# Altium PCB PowerReceiver.PcbDoc
Units mil, origin at the board's own origin, x right, y up, seen from the top; angles counter-clockwise.
Board outline 1181.1 x 1181.1 mil, 2 copper layers (Top Layer, Bottom Layer); 11 components, 6 nets, 26 pads, 0 vias.
Unrouted connection lines stored in the file: 17.
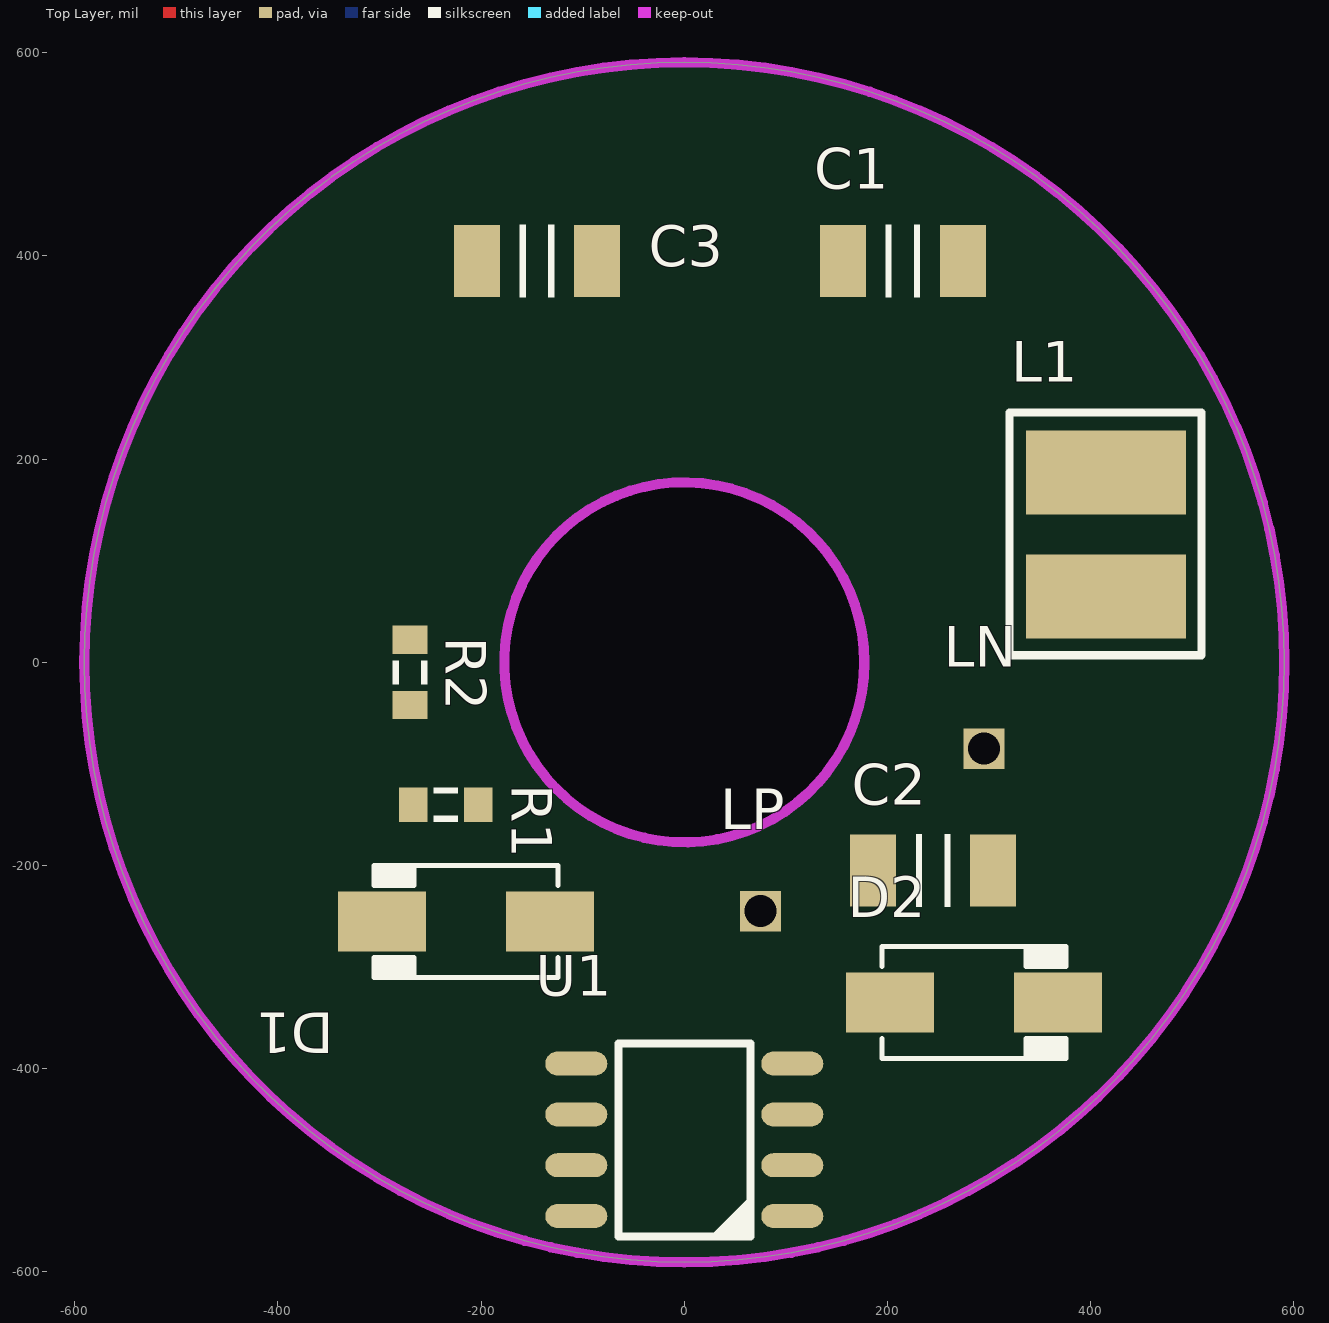
[diagram p0: Top Layer view]
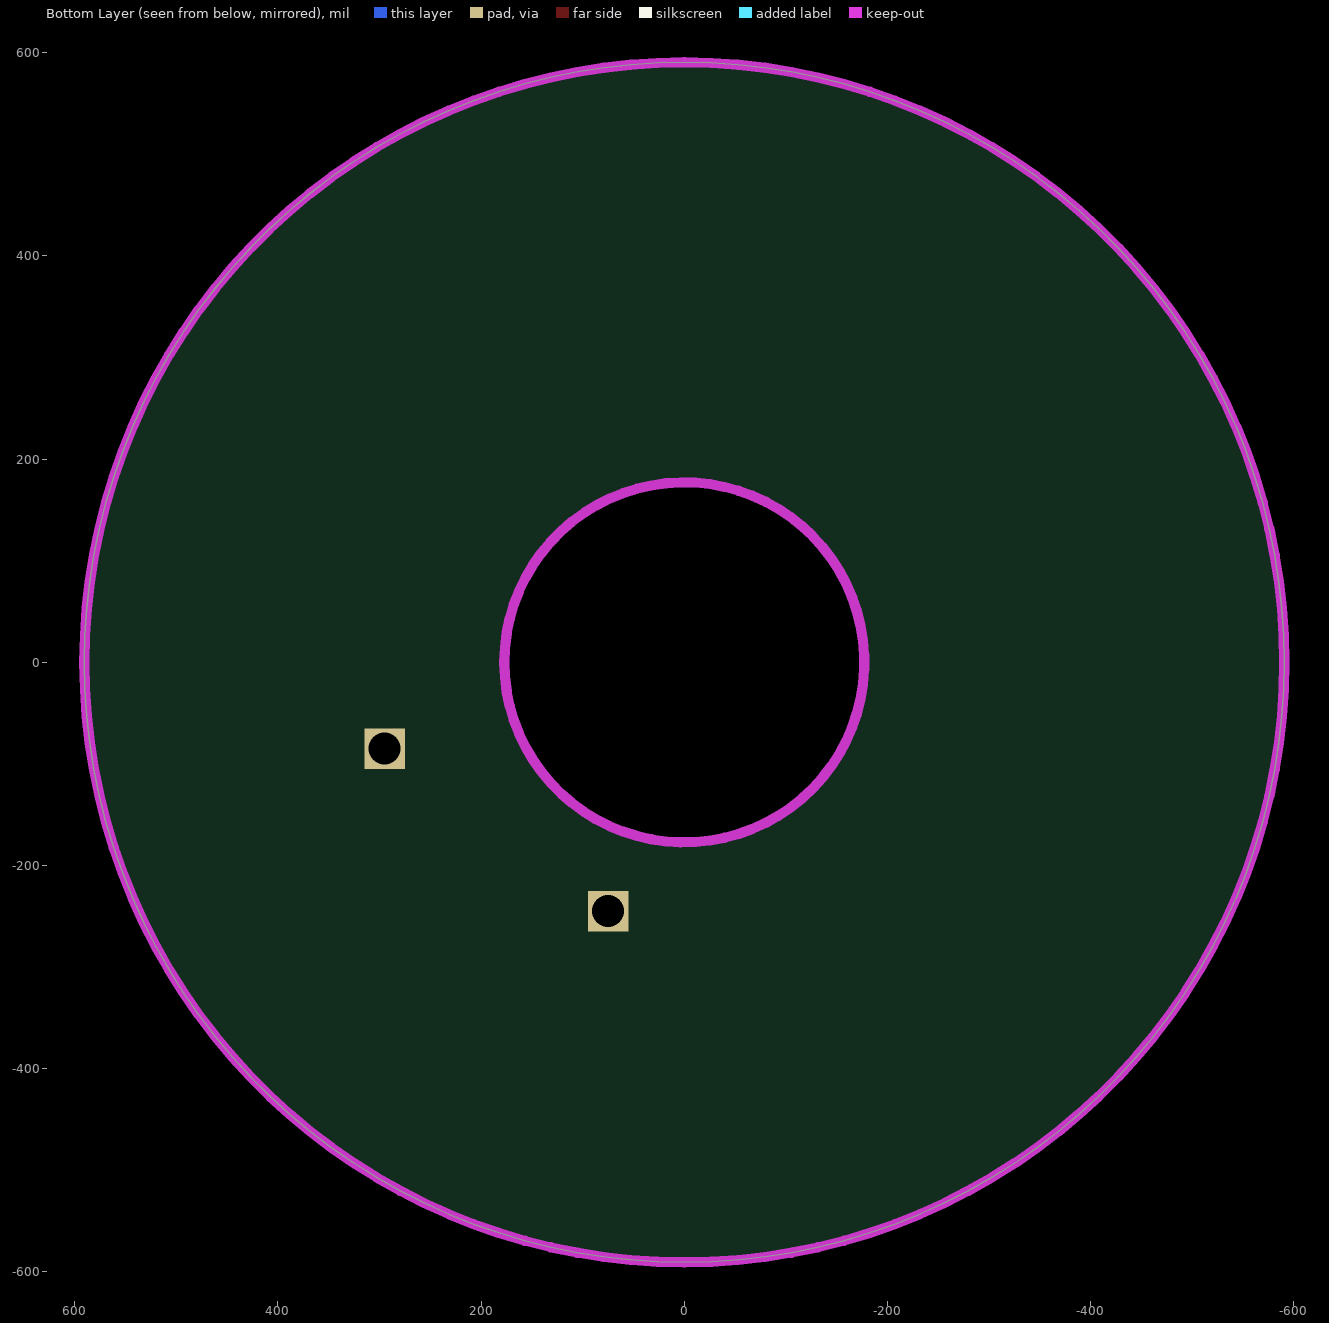
[diagram p1: Bottom Layer view, seen from below]

## Layer stack, top to bottom
Top Solder: solder mask 0.4, Solder Resist, Dk 3.5
Top Layer: signal copper 1.4
Dielectric 1: dielectric 12.6, FR-4, Dk 4.8
Bottom Layer: signal copper 1.4
Bottom Solder: solder mask 0.4, Solder Resist, Dk 3.5

## Board outline
-590.55,0 ccw(c0,0) 0,-590.55 ccw(c0,0) 590.55,0 ccw(c0,0) 0,590.55 ccw(c0,0)
cut-out: -177.17,0 ccw(c0,0) 0,-177.17 ccw(c0,0) 177.17,0 ccw(c0,0) 0,177.17 ccw(c0,0)

## Design rules (kind name [scope] priority, off if disabled: settings)
Clearance [All] p1: gap=10
PolygonConnect [All] p1: connectstyle=Relief reliefconductorwidth=10 reliefentries=4 polygonreliefangle="90 Angle" airgapwidth=10
RoutingVias [All] p1: holewidth=28 width=50 viastyle="Through Hole" minholewidth=28 minwidth=50 maxholewidth=28 maxwidth=50
SolderMaskExpansion [All] p1: expansion=4
UnpouredPolygon [All] p1: allowunpoured=FALSE
Width [All] p1: maxlimit=10 minlimit=10 preferedwidth=10
29 further rules are at their usual default settings.

## Components (designator, comment, footprint, x,y, rotation, side; value= is the part's Value field where it differs from the comment)
C1 "10uF/16V" CAP_1206 215,395 r0 top
C2 "39nF" CAP_1206 245,-205 r180 top
C3 "10uF/25V" CAP_1206 -145,395 r180 top
D1 "SS24" DO-214AC -215,-255 r180 top
D2 "SS24" DO-214AC 285,-335 r0 top
L1 "22uH" IND_0403 415,65 r90 top
LN "TestPoint" TestPoint_0.8mm 295,-85 r0 top
LP "TestPoint" TestPoint_0.8mm 75,-245 r0 top
R1 "Res_0603" RES_0603 -235,-140 r0 top
R2 "Res_0603" RES_0603 -270,-10 r270 top
U1 "T3168" SOIC_8 0,-470 r180 top

## Footprints (in the part's own frame and the unit in brackets; to place one, negate y for a bottom-side part, rotate by r counter-clockwise, add the part's x,y. Pads: shape width x height; smd on the part's side, far side on the other; paste and mask are expansions set on the pad)
CAP_1206 [mm]
  rect 1.15x1.8 smd: 1(-1.5,0) 2(1.5,0)
  silkscreen extent -0.43,-0.91 0.43,0.91, body extent -1.6,-0.8 1.6,0.8, height 1.52
DO-214AC [mm] "JEDEC DO214 variation AC. SMA"
  rect 2.2x1.5 smd: 1(-2.1,0) 2(2.1,0)
  silkscreen extent -2.3,-1.4 2.3,1.4, body extent -2.6,-1.3 2.6,1.3, height 2.42
IND_0403 [mm] "4.5×4.0×3.2mm"
  rect 2.1x4 smd: 1(0,0) 2(3.1,0)
  silkscreen extent -1.47,-2.39 4.6,2.41
RES_0603 [mil]
  rect 28x34 smd: 1(-32,0) 2(32,0)
  Top Layer pour cut-out: -18,17 18,17 18,-17 -18,-17
  silkscreen extent -12,-17 12,17, body extent -31,-16 32,16, height 20
SOIC_8 [mm]
  oval 1.55x0.6 smd: 1(-2.7,1.905) 2(-2.7,0.635) 3(-2.7,-0.635) 4(-2.7,-1.905) 5(2.7,-1.905) 6(2.7,-0.635) 7(2.7,0.635) 8(2.7,1.905)
  silkscreen extent -1.65,-2.41 1.65,2.41, body extent -3,-2.45 3,2.45, height 1.75
TestPoint_0.8mm [mil]
  rect 40x40 hole 31.5: 1(0,0)
  body extent -50,-50 50,50, height 192

## Part data
C1 C2 C3: library part Cap_1206, "Capacitor"
D1 D2: library part Diode_Schottky, "Diode"
L1: library part Ind_1210, "Inductor"
R1 R2: "Resistor"
U1: "Wireless charging reciver"

## Nets (pads, with @x,y where several pads share a name; then routed paths per layer and width w, separated by ;. In a path a pad name is that pad's centre, name@x,y a point inside that pad or via, vN(x,y) a via of type N, cw(c..) or ccw(c..) an arc to the next point about the centre after c; other vN are vias at no path point)
GND: C1.1 C2.1 C3.1 D2.1 LN.1 R2.1 U1.4
NetC2_2: C2.2 D1.1 LP.1
NetC3_2: C3.2 D1.2 U1.2 U1.7
NetD2_2: D2.2 L1.1 U1.3
NetR1_1: R1.1 R2.2 U1.5
OUT+: C1.2 L1.2 R1.2
pads on no net: U1.1 U1.6 U1.8

## Keep-outs
Keep-Out Layer:
  circle w10: c0,0 r590.55
  circle w10: c0,0 r177.17